# Altium PCB Copy of Kart2.PcbDoc (part 1 of 2)
Units mm, origin at the board's own origin, x right, y up, seen from the top; angles counter-clockwise.
Board outline 64 x 85 mm, 4 copper layers (Top Side, Ground Plane, Power Plane, Bottom Side), stack 0.844 mm thick; 85 components, 82 nets, 302 pads, 173 vias.
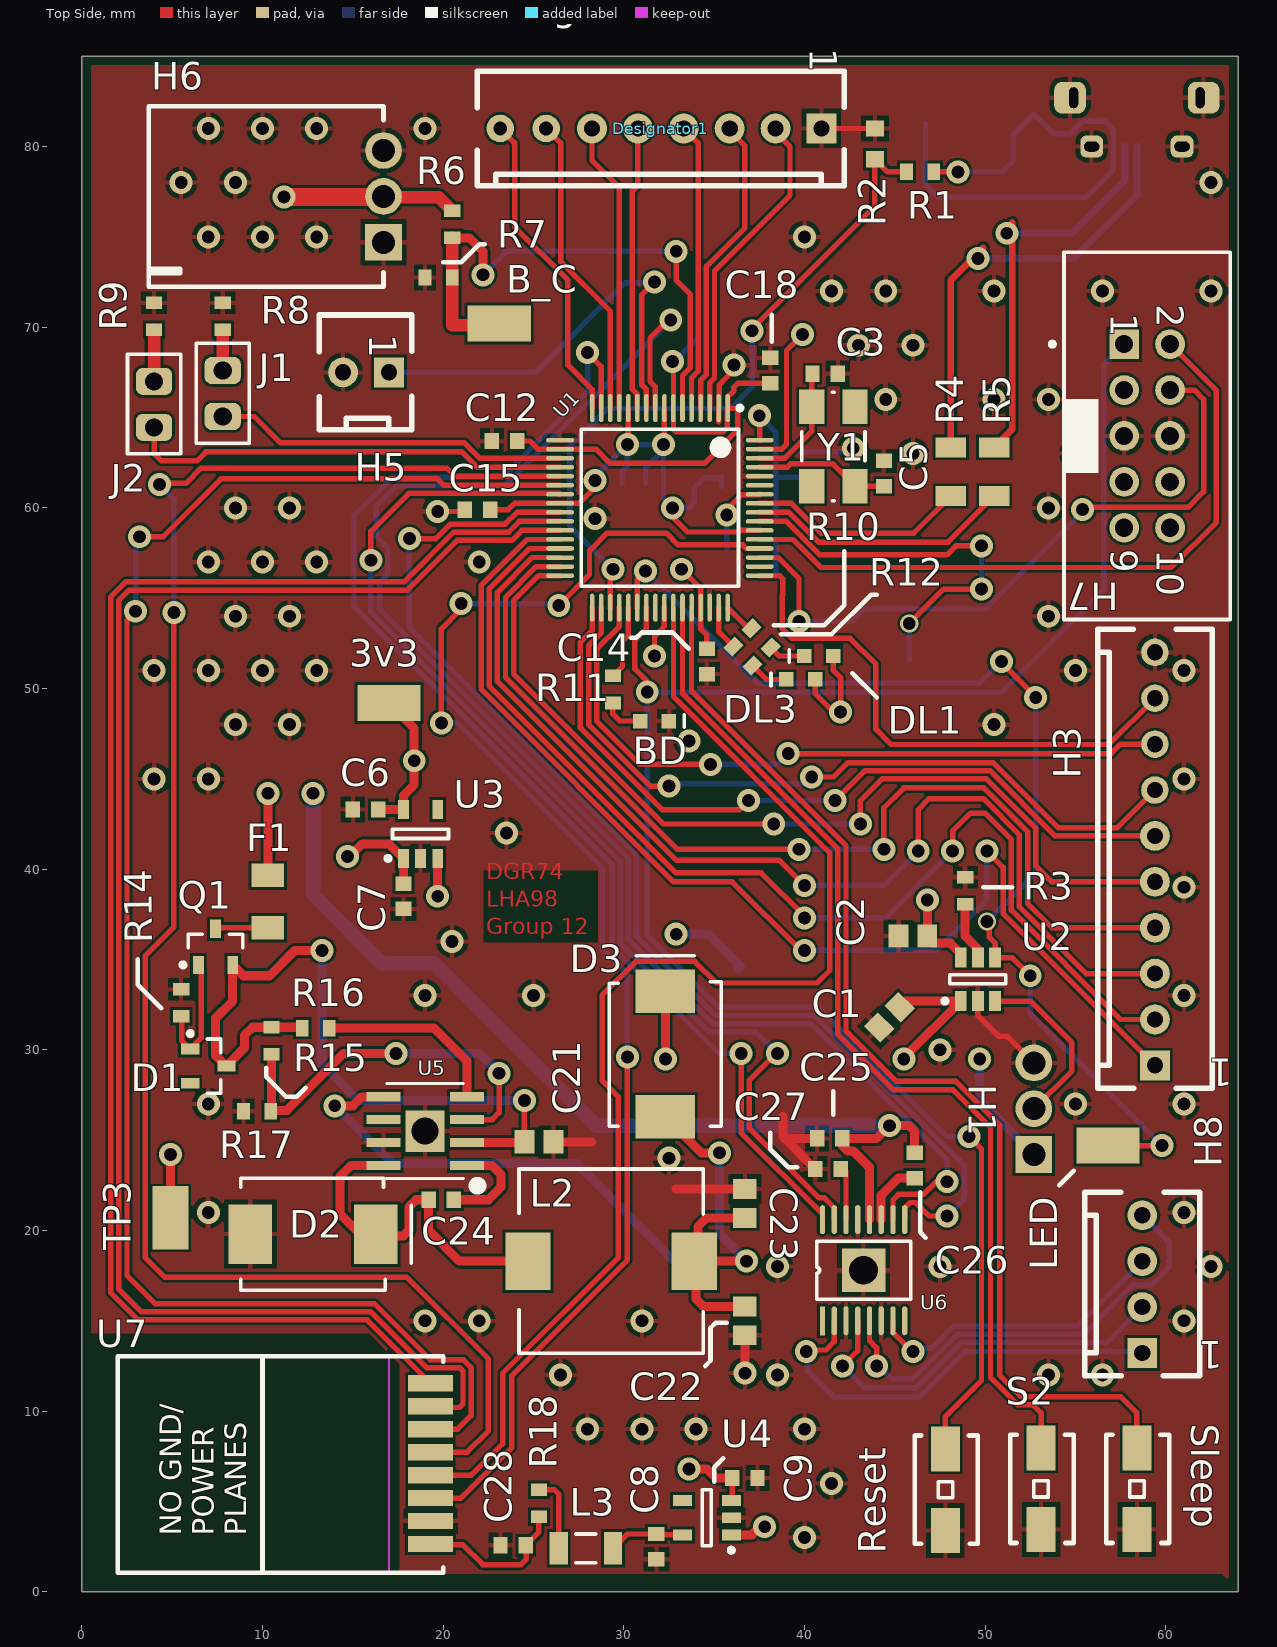
[diagram p0: Top Side view]
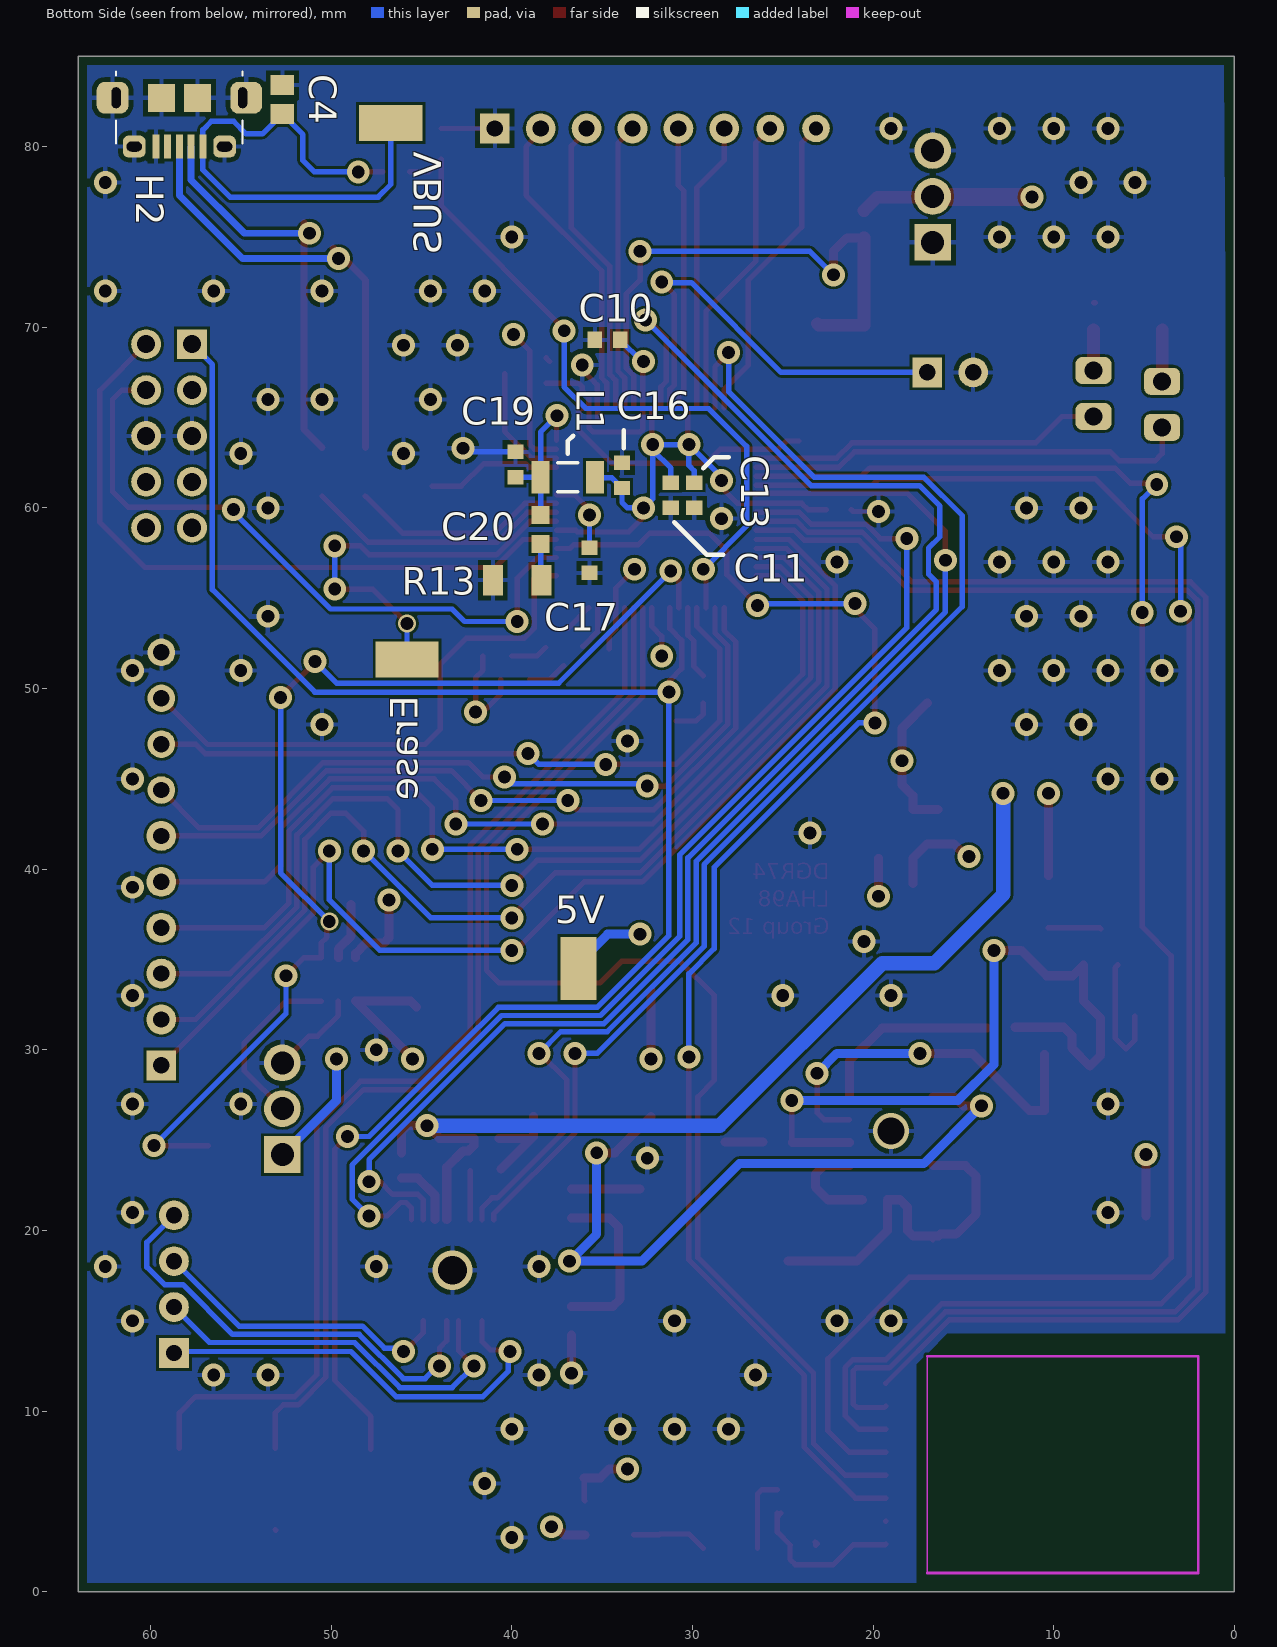
[diagram p1: Bottom Side view, seen from below]
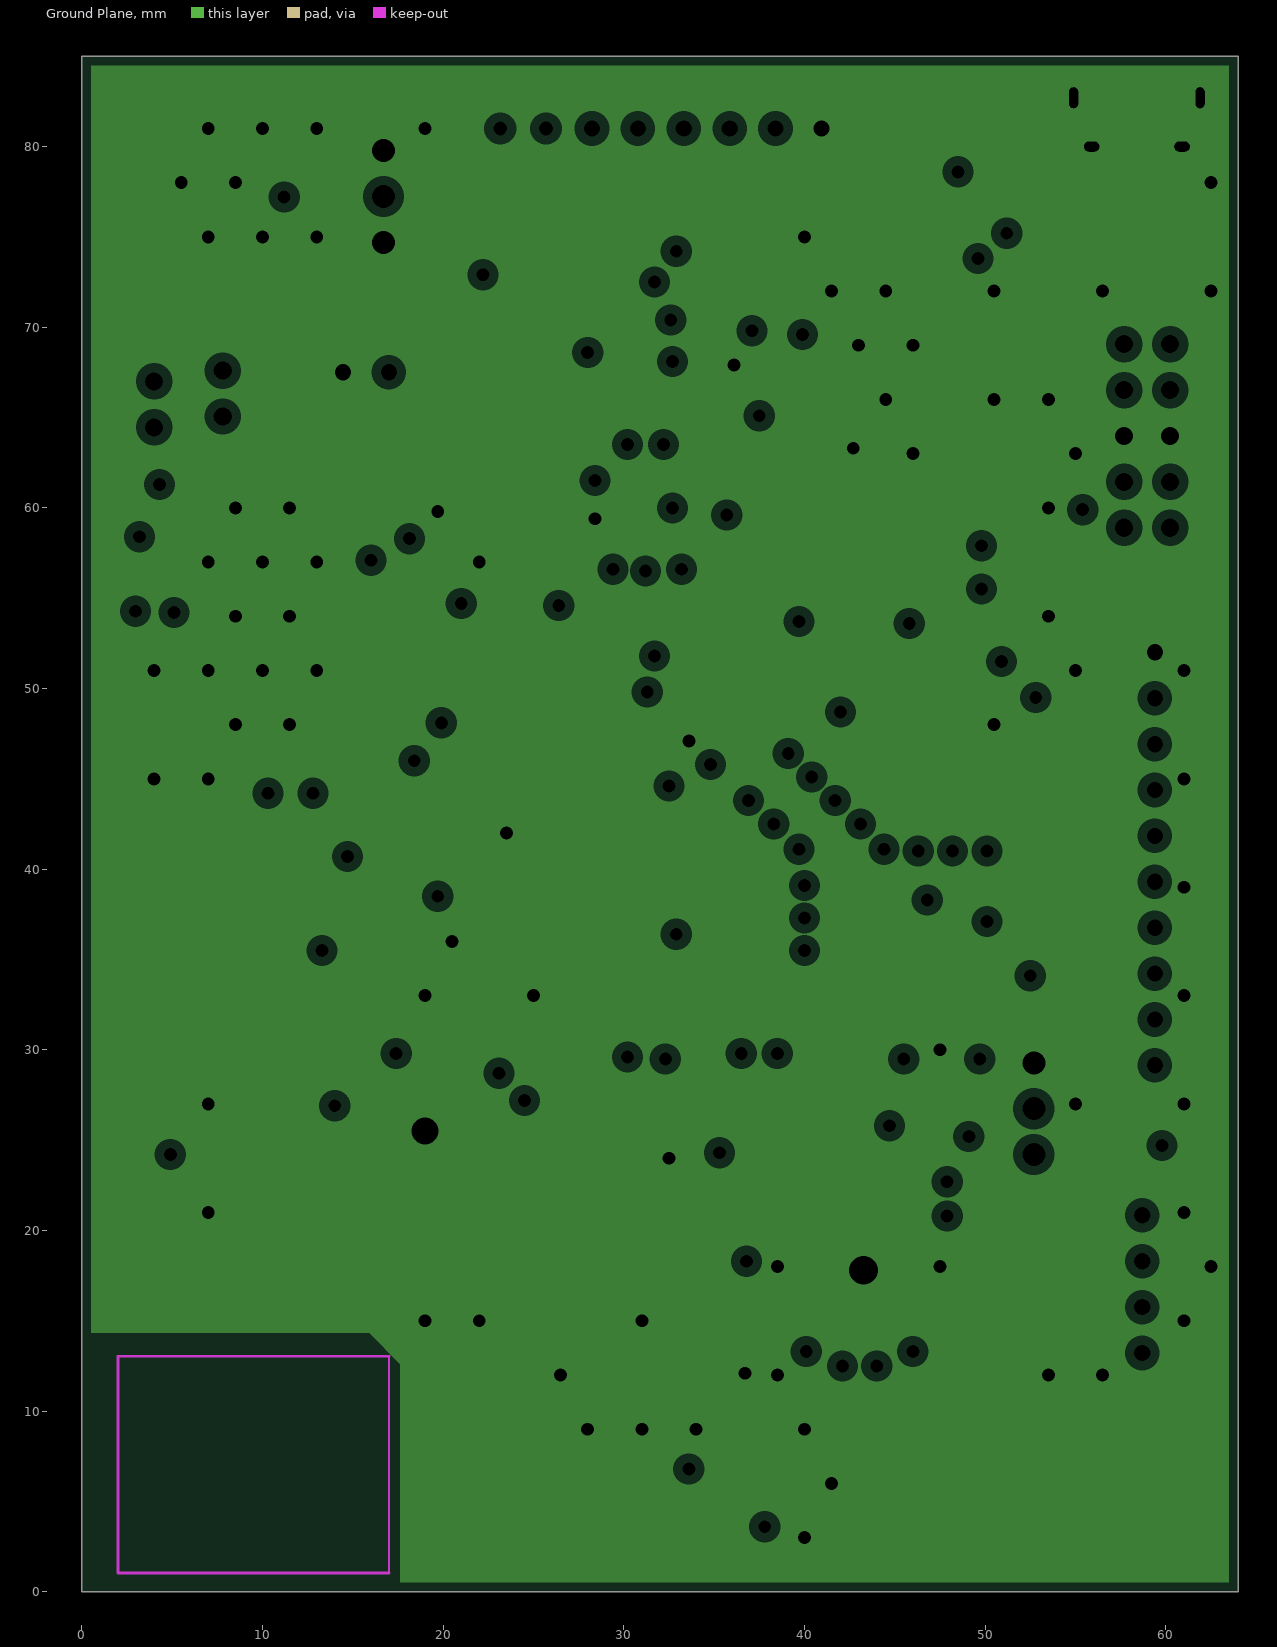
[diagram p2: Ground Plane, clearances drawn from the general rule]
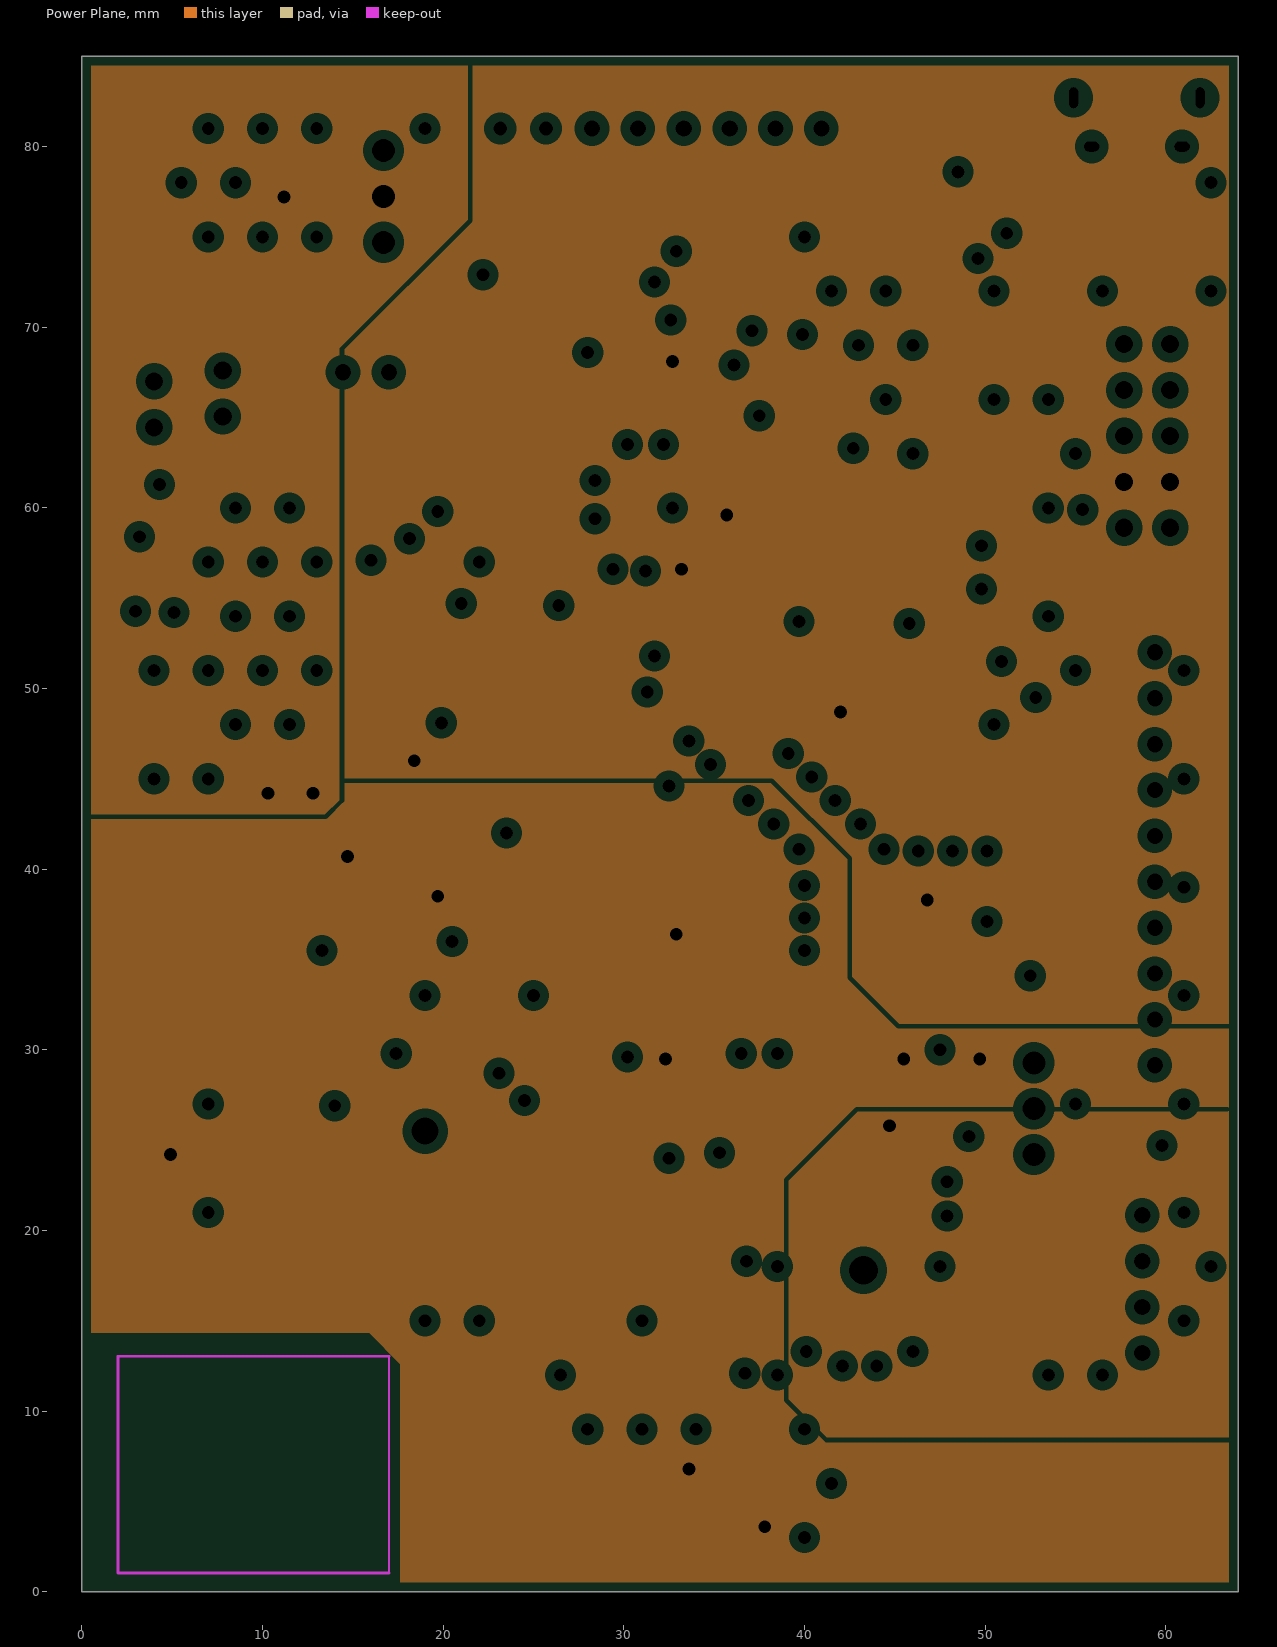
[diagram p3: Power Plane, clearances drawn from the general rule]

## Layer stack, top to bottom
Top Solder: solder mask 0.0102, Solder Resist, Dk 3.5
Top Side: signal copper 0.0356
Dielectric 1: core 0.32, FR-4, Dk 4.8
Ground Plane: plane copper 0.036, net GND
Dielectric 3: prepreg 0.127, Dk 4.2
Power Plane: plane copper 0.036, net (Multiple Nets)
Dielectric 4: core 0.254, Dk 4.2
Bottom Side: signal copper 0.0356
Bottom Solder: solder mask 0.0102, Solder Resist, Dk 3.5

## Board outline
0,85 64,85 64,0 0,0 0,85

## Design rules (kind name [scope] priority, off if disabled: settings)
BoardOutlineClearance [All] p1: gap=0.5 ignorepadtopadclearanceinfootprint=FALSE
Clearance Min_Clearance_Circuit_Labs [All] p1: gap=0.15 ignorepadtopadclearanceinfootprint=FALSE except(0: Arc-Hole Track-Hole SMDPad-Hole THPad-Hole Via-Hole Fill-Hole Poly-Hole Region-Hole Text-Hole)
DiffPairsRouting [All] p1: maxlimit=0.254 minlimit=0.254 mostfreqgap=0.254 toplayer_minwidth=0.381 toplayer_maxwidth=0.381 toplayer_prefwidth=0.381 bottomlayer_minwidth=0.381 bottomlayer_maxwidth=0.381 bottomlayer_prefwidth=0.381 maxuncoupledlength=12.7
FanoutControl Fanout_BGA [IsBGA] p1 off: bgadir=Out bgaviamode=Centered fanoutstyle=Auto fanoutdirection=Alternating viagrid=0.025 // Fanout_BGA (Default Rule)
HoleSize [All] p1: absolutevalues=TRUE maxlimit=10 minlimit=0.3 maxpercent=80.000 minpercent=20.000
MinimumAnnularRing [All] p1: minimumring=0.1
MinimumSolderMaskSliver [All] p1: minsoldermaskwidth=0.1
NetAntennae [All] p1: netantennaetolerance=1
PasteMaskExpansion [All] p1 off: expansion=0.2
PlaneClearance [All] p1: clearance=0.508
PlaneConnect [All] p1: planeconnectstyle=Relief reliefexpansion=0.508 reliefentries=4 reliefconductorwidth=0.254 reliefairgap=0.254
PolygonConnect [All] p1: connectstyle=Relief reliefconductorwidth=0.254 reliefentries=4 polygonreliefangle="90 Angle" airgapwidth=0.254
RoutingVias [All] p1: holewidth=0.5 width=1 viastyle="Through Hole" minholewidth=0.3 minwidth=0.6 maxholewidth=1 maxwidth=2
SMDNeckDown [All] p1 off: percent=50.000
SMDToCorner [All] p1: distance=98425
SMDToPlane [All] p1: distance=1968504
SilkToSolderMaskClearance SilkscreenOverComponentPads [IsPad] p1: minsilkscreentomaskgap=0.254 clearancetoexposedcopper=TRUE
SolderMaskExpansion [All] p1: expansion=0.102
ViasUnderSMD [All] p1: allowed=FALSE
Width [All] p1: maxlimit=2 minlimit=0.15 preferedwidth=0.3
21 further rules are at their usual default settings.

## Classes and differential pairs
component class RadioModule: C28 L3 R18 U7
component class MCU: 3v3 B_C BD C1 C2 C3 C4 C5 C6 C7 C8 C9 C10 C11 C12 C13 C14 C15 C16 C17 C18 C19 C20 DL1 DL3 Erase H1 H2 H3 H5 H6 H7 J1 J2 L1 LED R1 R2 R3 R4 R5 R6 R7 R8 R9 R10 R11 R12 R13 Reset S2 Sleep TP3 U1 U2 U3 U4 VBUS Y1
component class H-Bridge: C25 C26 C27 H8 U6
component class Buck_Reg: C21 C22 C23 C24 D1 D2 D3 F1 L2 Q1 R14 R15 R16 R17 U5
differential pair D: +D_P -D_N

## Components (designator, comment, footprint, x,y, rotation, side; value= is the part's Value field where it differs from the comment)
3v3 "3V3" TP_1206#1 17,49.2 r0 top value=TP (schematic designator TP5)
5V "Comment" TP_1206#1 36.3,34.5 r270 bottom
B_C "BATTERY" TP_1206#1 23.1,70.2 r0 top value=TP (schematic designator TP4)
BD "Red" WL-SMCW0603 32.5,48.2 r180 top (schematic designator DL2)
C1 "10uF" CAPC2012L 44.7,31.8 r45 top
C2 "10uF" CAPC2012L 46,36.3 r180 top
C3 "27pF" CAPC1608L 41.146,67.427 r180 top
C4 "4.7uF" CAPC2012L 52.7,82.6 r90 bottom
C5 "27pF" CAPC1608L 44.4,61.9 r270 top
C6 "1uF" CAPC1608L 15.7,43.3 r0 top
C7 "1uF" CAPC1608L 17.8,38.5 r90 top
C8 "1uF" CAPC1608L 31.8,2.5 r90 top
C9 "1uF" CAPC1608L 36.7,6.3 r180 top
C10 "100nF" CAPC1608L 34.7,69.3 r180 bottom
C11 "100nF" CAPC1608L 31.2,60.7 r270 bottom
C12 "100nF" CAPC1608L 23.4,63.7 r0 top
C13 "100nF" CAPC1608L 29.9,60.7 r270 bottom
C14 "100nF" CAPC1608L 34.6,51.5 r90 top
C15 "100nF" CAPC1608L 21.9,59.9 r180 top
C16 "100nF" CAPC1608L 33.9,61.8 r90 bottom
C17 "100nF" CAPC1608L 35.7,57.1 r90 bottom
C18 "100nF" CAPC1608L 38.1,67.6 r270 top
C19 "100nF" CAPC1608L 39.8,62.4 r270 bottom
C20 "4.7uF" CAPC1608N 38.4,58.8 r90 bottom
C21 "10uF" CAPC2012L 25.3,24.9 r180 top
C22 "33uF" CAPC2012L 36.7,15 r90 top
C23 "33uF" CAPC2012L 36.7,21.5 r270 top
C24 "100nF" CAPC1608L 19.9,21.7 r180 top
C25 "10uF" CAPC1608L 41.4,25.1 r180 top
C26 "10nF" CAPC1608L 46.1,23.6 r90 top
C27 "2.2uF" CAPC1608L 41.3,23.4 r180 top
C28 "10uF" CAPC1608L 23.876,2.576 r0 top
D1 "4V7" SOT23_L 7,29.1 r0 top
D2 "SCHOTTKY 30V 4A" SMC 12.8,19.8 r0 top
D3 "SCHOTTKY 30V 4A" SMC 32.3,29.775 r90 top
Designator1 "Comment" MOLEX_KK_8_HDR 40.94,81 r180 top
DL1 "Dark Green" WL-SMCW0603 40,51.8 r0 top
DL3 "Blue" WL-SMCW0603 39,50.5 r0 top
Erase "Erase" TP_1206#2 45.8,51.6 r180 top value=TP (schematic designator TP6)
F1 "5A" RESC3216N 10.3,38.2 r270 top
H1 "HEADER_3" HEADER_3POS 52.7,26.74 r90 top
H2 "JS_USB_MICRO_B" FCI_USB_10118194-0001LF 58.4,84.15 r0 bottom
H3 "10 Pin Molex KK Hdr" MOLEX_KK_10_HDR 59.4,29.14 r90 top
H5 "2 Pin Molex KK HDR" MOLEX_KK_2_HDR 17,67.5 r180 top
H6 "Battery_HEADER_3pin" BATT_HEADER_3POS 16.7,77.24 r90 top
H7 "Header 5X2 Vert" IDC2.54-V10D 58.97,63.98 r270 top
H8 "4 Pin Molex KK Hdr" MOLEX_KK_4_HDR 58.7,13.22 r90 top
J1 "100Mil Jumper" JMP2.54 7.8,65.056 r90 top
J2 "100Mil Jumper" JMP2.54 4,64.456 r90 top
L1 "1A max, Idc 0.3R," INDC3216L 36.9,61.7 r180 bottom
L2 "IND 5.2UH 6A" INDUCTOR5u2 29.3,18.3 r0 top
L3 "1A max, Idc 0.3R," INDC3216L 27.9,2.4 r0 top
LED "LED STRIP" TP_1206#1 56.8,24.7 r0 top value=TP (schematic designator TP1)
Q1 "SSM3J328R,LF" SOT23_L 7.4,35.7 r90 top
R1 "27K" RESC1608L 46.4,78.6 r0 top
R2 "47K" RESC1608N 43.9,80.15 r270 top
R3 "10K" RESC1608L 48.9,38.8 r270 top
R4 "27R" RESC3216L 48.1,62 r270 top
R5 "27R" RESC3216L 50.5,62 r270 top
R6 "150K" RESC1608L 20.5,75.7 r90 top
R7 "300K" RESC1608L 19.75,72.75 r0 top
R8 "10K" RESC1608L 7.8,70.6 r270 top
R9 "10K" RESC1608L 4,70.6 r270 top
R10 "2K2" RESC1608L 37.6,52.8 r135 top
R11 "2K2" RESC1608L 29.4,49.95 r270 top
R12 "2K2" RESC1608L 36.6,51.8 r135 top
R13 "1R" RESC3216L 39.7,56 r180 bottom
R14 "100K" RESC1608L 5.5,32.6 r270 top
R15 "56K" RESC1608L 10.5,30.5 r90 top
R16 "100K" RESC1608L 12.95,31.2 r180 top
R17 "10K" RESC1608L 9.7,26.6 r0 top
R18 "10R" RESC1608L 25.3,4.9 r90 top
Reset "EVQPNF05M" EVQPNF05M 47.8,5.65 r270 top (schematic designator S1)
S2 "EVQPNF05M" EVQPNF05M 53.1,5.7 r270 top
Sleep "EVQPNF05M" EVQPNF05M 58.4,5.7 r270 top (schematic designator S3)
TP3 "5V" TP_1206#1 4.9,20.7 r270 top value=TP
U1 "ATSAM4S8BA-ANR" LQFP64_L 32,60 r270 top locked
U2 "SN74LVC1T45" SOT23-6_N 49.6,33.9 r90 top
U3 "CAT6219-330TDGT3" SOT95P280X145-5N 18.75,41.95 r90 top
U4 "CAT6219-330TDGT3" SOT95P280X145-5N 34.6,4.1 r180 top
U5 "ADP2302ARDZ-5.0 BUCK" RD_8_1 19,25.5 r180 top locked value=Value
U6 "DRV8833" HTSOP16 41,15 r90 top locked
U7 "nRF24 SMD" NRF24 20,1.043 r90 top
VBUS "VBUS" TP_1206#2 46.7,81.3 r180 top value=TP (schematic designator TP2)
Y1 "12MHz" 6.0X3.5-4 41.6,63.4 r90 top

## Footprints (in the part's own frame and the unit in brackets; to place one, negate y for a bottom-side part, rotate by r counter-clockwise, add the part's x,y. Pads: shape width x height; smd on the part's side, far side on the other; paste and mask are expansions set on the pad)
6.0X3.5-4 [mm] "4 SMD 6.0X3.5 mm No Lead Crystal"
  rect 1.9x1.4 smd: 1(-2.2,-1.2) 2(2.2,-1.2) 3(2.2,1.2) 4(-2.2,1.2)
  silkscreen extent -3,-1.75 3,1.75, body extent -3,-1.75 3,1.75, height 1.2
BATT_HEADER_3POS [mil]
  rect 80x80 hole 50: 1(-100,0)
  round 80 hole 50: 2(0,0) 3(100,0)
  silkscreen extent -197,0 197,512
CAPC1608L [mm] "Chip Capacitor, Body 1.6x0.8mm, IPC High Density"
  rect 0.8x0.9 smd: 1(-0.7,0) 2(0.7,0)
  body extent -0.87,-0.48 0.87,0.48, height 0.85
CAPC1608N [mm] "Chip Capacitor, Body 1.6x0.8mm, IPC Medium Density"
  rect 1x1 smd: 1(-0.8,0) 2(0.8,0)
  body extent -0.87,-0.48 0.87,0.48, height 0.85
CAPC2012L [mm] "Chip Capacitor, Body 2.0x1.3mm, IPC High Density"
  rect 1.1x1.3 smd: 1(-0.8,0) 2(0.8,0)
  body extent -1.1,-0.72 1.1,0.72, height 1.1
EVQPNF05M [mm] "Panansonic light touch SMD push button switch"
  rect 2.5x1.6 smd: 1(-2.25,0) 2(2.25,0)
  silkscreen extent -3,-1.7 3,1.8, body extent -3,-1.7 3,1.8, height 5
FCI_USB_10118194-0001LF [mm] "Micro USB B Type Receptacle"
  rect 0.4x1.35 smd mask+0.07: 1(-1.3,4.15) 2(-0.65,4.15) 3(0,4.15) 4(0.65,4.15) 5(1.3,4.15)
  rrect50% 1.75x1.75 hole 0.5 slot 1.15 at 90 deg copper offset -0.2,0 paste+0 mask+0.1: 6(-3.5,1.45)
  rrect50% 1.25x1.2 hole 0.55 slot 0.85 at 0 deg: 6(-2.5,4.15) 6(2.5,4.15)
  rect 1.5x1.55 smd: 6(-1,1.45) 6(1,1.45)
  rrect50% 1.75x1.75 hole 0.5 slot 1.15 at 90 deg copper offset 0.2,0 paste+0 mask+0.1: 6(3.5,1.45)
  silkscreen extent -3.5,0 3.5,4
HEADER_3POS [mil]
  rect 80x80 hole 50: 1(-100,0)
  round 80 hole 50: 2(0,0) 3(100,0)
HTSOP16 [mm]
  rect 1.6x0.3 smd: 1(0,0)
  oval 1.6x0.3 smd: 2(0,-0.65) 3(0,-1.3) 4(0,-1.95) 5(0,-2.6) 6(0,-3.25) 7(0,-3.9) 8(0,-4.55) 9(5.6,-4.55) 10(5.6,-3.9) 11(5.6,-3.25) 12(5.6,-2.6) 13(5.6,-1.95) 14(5.6,-1.3) 15(5.6,-0.65) 16(5.6,0)
  rect 2.4x2.4 smd paste-0.5: 17(2.8,-2.275)
  silkscreen extent 1.2,-4.88 4.4,0.33
IDC2.54-V10D [mm] "Connector; IDC, Low Profile Male Header, Thru-Hole; 10 Position; Vertical; Pitch 2.54 mm; Body 20.32 x 9.2 x 9.45 mm (LxWxH)"
  rect 1.65x1.65 hole 1: 1(-5.08,-1.27)
  round 1.65 hole 1: 2(-5.08,1.27) 3(-2.54,-1.27) 4(-2.54,1.27) 5(0,-1.27) 6(0,1.27) 7(2.54,-1.27) 8(2.54,1.27) 9(5.08,-1.27) 10(5.08,1.27)
  silkscreen extent -10.16,-5.37 10.16,4.6, body extent -10.16,-4.6 10.16,4.6, height 9.45
INDC3216L [mm] "Chip Inductor, Body 3.2x1.6mm, IPC High Density"
  rect 1x1.8 smd: 1(-1.5,0) 2(1.5,0)
  silkscreen extent -0.55,-0.8 0.55,0.8, body extent -1.75,-0.95 1.75,0.95, height 1.9
INDUCTOR5u2 [mm]
  rect 2.5x3.2 smd: 1(-4.6,0) 2(4.6,0)
  silkscreen extent -5.1,-5.1 5.1,5.1
JMP2.54 [mm] "Jumper Change over 2.54mm"
  rrect50% 1.5x2 hole 1: 1(0,0) 2(2.544,0)
  silkscreen extent -1.47,-1.47 4.05,1.47, body extent -1.43,-1.43 4.05,1.43, height 8.45
LQFP64_L [mm] "Thin QFP, 64-Leads, Body 10x10mm, Pitch 0.5mm, IPC High Density"
  oval 1.55x0.25 smd mask+0.07: 1(-5.525,3.75) 2(-5.525,3.25) 3(-5.525,2.75) 4(-5.525,2.25) 5(-5.525,1.75) 6(-5.525,1.25) 7(-5.525,0.75) 8(-5.525,0.25) 9(-5.525,-0.25) 10(-5.525,-0.75) 11(-5.525,-1.25) 12(-5.525,-1.75) 13(-5.525,-2.25) 14(-5.525,-2.75) 15(-5.525,-3.25) 16(-5.525,-3.75) 33(5.525,-3.75) 34(5.525,-3.25) 35(5.525,-2.75) 36(5.525,-2.25) 37(5.525,-1.75) 38(5.525,-1.25) 39(5.525,-0.75) 40(5.525,-0.25) 41(5.525,0.25) 42(5.525,0.75) 43(5.525,1.25) 44(5.525,1.75) 45(5.525,2.25) 46(5.525,2.75) 47(5.525,3.25) 48(5.525,3.75)
  oval 0.25x1.55 smd mask+0.07: 17(-3.75,-5.525) 18(-3.25,-5.525) 19(-2.75,-5.525) 20(-2.25,-5.525) 21(-1.75,-5.525) 22(-1.25,-5.525) 23(-0.75,-5.525) 24(-0.25,-5.525) 25(0.25,-5.525) 26(0.75,-5.525) 27(1.25,-5.525) 28(1.75,-5.525) 29(2.25,-5.525) 30(2.75,-5.525) 31(3.25,-5.525) 32(3.75,-5.525) 49(3.75,5.525) 50(3.25,5.525) 51(2.75,5.525) 52(2.25,5.525) 53(1.75,5.525) 54(1.25,5.525) 55(0.75,5.525) 56(0.25,5.525) 57(-0.25,5.525) 58(-0.75,5.525) 59(-1.25,5.525) 60(-1.75,5.525) 61(-2.25,5.525) 62(-2.75,5.525) 63(-3.25,5.525) 64(-3.75,5.525)
  silkscreen extent -5.65,-4.35 4.35,4.55, body extent -5,-5 5,5, height 1.6
MOLEX_KK_2_HDR [mil] "MOLEX_KK_2_HDR"
  rect 65x65 hole 35.43: 1(0,0)
  round 65 hole 35.43: 2(100,0)
  silkscreen extent -50,-125 152,125, body extent -44,-121 146,119, height 630
MOLEX_KK_4_HDR [mil] "MOLEX_KK_4_HDR"
  rect 65x65 hole 35.43: 1(0,0)
  round 65 hole 35.43: 2(100,0) 3(200,0) 4(300,0)
  silkscreen extent -50,-125 350,125, body extent -44,-119 343,119, height 630
MOLEX_KK_8_HDR [mil] "MOLEX_KK_8_HDR"
  rect 65x65 hole 35.43: 1(0,0)
  round 65 hole 35.43: 2(100,0) 3(200,0) 4(300,0) 5(400,0) 6(500,0)
  round 60 hole 30: 7(600,0) 8(700,0)
  silkscreen extent -50,-125 750,125, body extent -43,-119 743,119, height 630
MOLEX_KK_10_HDR [mil] "MOLEX_KK_10_HDR"
  rect 65x65 hole 35.43: 1(0,0)
  round 65 hole 35.43: 2(100,0) 3(200,0) 4(300,0) 5(400,0) 6(500,0)
  round 60 hole 35.43: 7(600,0) 8(700,0) 9(800,0) 10(900,0)
  silkscreen extent -50,-125 951,125, body extent -44,-120 944,120, height 630
NRF24 [mm]
  rect 0.9x2.5 smd: 1(1.6,0.7) 2(2.871,0.7) 3(4.143,0.7) 4(5.414,0.7) 5(6.686,0.7) 6(7.957,0.7) 7(9.229,0.7) 8(10.5,0.7)
  Keep-Out Layer lines w0.1: 0,3 12,3
  Keep-Out Layer lines w0.15: 0,3 0,18 12,18 12,3
  silkscreen extent 0,0 12,18
RD_8_1 [mil]
  rect 74x20 smd paste+0 mask+0: 1(-91,75) 2(-91,25) 3(-91,-25) 4(-91,-75) 5(91,-75) 6(91,-25) 7(91,25) 8(91,75)
  rect 84.65x90 smd paste-44.5 mask+0: EPAD(0,0)
  silkscreen extent -118,-104 84,123, body extent 0,0 10,10, height 10
RESC1608L [mm] "Chip Resistor, Body 1.6x0.8mm, IPC High Density"
  rect 0.7x0.9 smd: 1(-0.75,0) 2(0.75,0)
  body extent -0.85,-0.48 0.85,0.48, height 0.9
RESC1608N [mm] "Chip Resistor, Body 1.6x0.8mm, IPC Medium Density"
  rect 0.9x1 smd: 1(-0.85,0) 2(0.85,0)
  body extent -0.85,-0.48 0.85,0.48, height 0.6
RESC3216L [mm] "Chip Resistor, Body 3.1x1.6mm, IPC High Density"
  rect 1.1x1.7 smd: 1(-1.35,0) 2(1.35,0)
  body extent -1.68,-0.87 1.68,0.87, height 2.54
RESC3216N [mm] "Chip Resistor, Body 3.2x1.6mm, IPC Medium Density"
  rect 1.3x1.8 smd: 1(-1.45,0) 2(1.45,0)
  body extent -1.68,-0.87 1.68,0.87, height 0.71
SMC [mm] "DO-214-AB/SMC; 2 C-Bend Leads; Body 7.9 x 5.9 mm, inc. leads (LxW)"
  rect 2.4x3.3 smd: 1(-3.475,0) 2(3.475,0)
  silkscreen extent -4,-3.1 5.43,3.1
SOT23-6_N [mm]
  rect 1.1x0.65 smd: 1(-1.2,0.95) 2(-1.2,0) 3(-1.2,-0.95) 4(1.2,-0.95) 5(1.2,0) 6(1.2,0.95)
  silkscreen extent -1.32,-1.55 0.25,1.95, body extent -0.9,-1.55 0.9,1.55, height 1.45
SOT23_L [mm] "SOT23, 3-Leads, Body 2.9x1.3mm, Pitch 0.95mm, Lead Span 2.3mm, IPC High Density"
  rect 1x0.6 smd: 1(-1,0.95) 2(-1,-0.95) 3(1,0)
  silkscreen extent -1.12,-1.5 0.7,1.92, body extent -0.7,-1.5 0.7,1.5, height 1.1
SOT95P280X145-5N [mm] "SOT23, 5-Leads, Body 2.90x2.80mm, Pitch 0.95mm, IPC Medium Density"
  rect 1.05x0.6 smd: 1(-1.35,0.95) 2(-1.35,0) 3(-1.35,-0.95) 4(1.35,-0.95) 5(1.35,0.95)
  silkscreen extent -1.47,-1.55 0.25,1.92, body extent -0.87,-1.52 0.87,1.53, height 1.45
TP_1206#1 [mm] "Test Point Pad"
  rect 3.5x2 smd: 1(0,0)
  body extent -1.62,-0.85 1.63,0.8, height 2
TP_1206#2 [mm] "Test Point Pad"
  rect 3.5x2 smd far side: 1(0,0)
  body extent -1.62,-0.85 1.63,0.8, height 2
WL-SMCW0603 [mm] "2.4 x 0.8 x 0.7mm LED"
  rect 0.8x0.8 smd: 1(0,0) 2(1.6,0)
  silkscreen extent -0.85,-0.35 -0.85,0.35

## Part data
3v3 B_C Erase LED TP3 VBUS: library part TP_1206, "Test-Point 3.3x1.6x2.1mm SMD", Manufacturer="Harwin Inc", Manufacturer Part Number=S1751-46R, Supplier Part Number 1=952-1478-2-ND, Mounting Type="Surface Mount", Storage Location=ProtoPlace, Supplier="ECE Dept", Supplier 1=Digi-Key, Supplier 2=Farnell, Supplier Part Number 2=1826282, Type="PC Test Point"
BD: library part DL_150060RS75000, "LED Red 250mcd 0603 SMD", Forward Current If=30, Forward Voltage=2, Manufacturer="WURTH ELEKTRONIK", Manufacturer Part Number=150060RS75000, Supplier Part Number 1=2322071, LED Colour=Red, LED Mounting=SMD, Lens Shape=Rectangular, Luminous Intensity=250, Storage Location="PCB Assembly WS", Supplier="ECE Dept", Supplier 1=Farnell, Viewing Angle=140°, Wavelength Typ=625
C1 C2 C21: library part CC_10uF_16V_0805, "CAP CER 10uF X5R 16V 0805", Manufacturer="Samsung Electro-Mechanics", Manufacturer Part Number=CL21A106KOQNNWE, Max Voltage=16V, Operating Temperature="-55°C ~ 85°C", Package / Case="0805 (2012 Metric)", Ratings=-, Supplier Part Number 1=1276-2894-1-ND, Temperature Coefficient=X5R, Tolerance=±10%, Applications="General Purpose", Category=Capacitors, Code_IPC=2012[0805], ComponentLink1Description=http://www.samsungsem.com/kr/support/product-search/mlcc/CL21A106KOQNNWE.jsp, ComponentLink1URL=http://www.samsungsem.com/kr/support/product-search/mlcc/CL21A106KOQNNWE.jsp, Features=-, Height - Seated (Max)=-, Lead Spacing=-, Lead Style=-, Mounting Type="Surface Mount, MLCC", Note="Footprint corresponds to dimensions for bulk cassette packaging. This case size has tightened tolerances.", Notification="Current market demand for these product types have resulted in fluctuating and extending lead times. Lead times may differ.", PackageReference=0805, Packaging="Cut Tape (CT)", Part Status=Active, Pricing 1="1=0.35, 10=0.25, 100=0.1178, 500=0.08254, 1000=0.06831 (NZD)", RoHS="RoHS Compliant", Size / Dimension="0.079\" L x 0.049\" W (2.00mm x 1.25mm)", Stock 1=20000, Supplier 1=Digi-Key, Thickness (Max)="0.055\" (1.40mm)", Voltage - Rated=16V
C3 C5: library part CC_27pF_0603, "CAP CER 27pF NPO/COG +-5% 50V 0603", Code_IPC="1608 [0603]", PackageReference=0603, Storage Location="PCB Assembly WS", Supplier="ECE Dept"
C4: library part CC_4.7uF_0805, "CAP CER 4.7uF Y5V -20% +80% 25V 0805", Max Voltage=25V, Code_IPC=2012[0805], Note="Footprint corresponds to dimensions for bulk cassette packaging. This case size has tightened tolerances.", PackageReference=0805, Storage Location="PCB Assembly WS", Supplier="ECE Dept"
C6 C7 C8 C9: library part CC_1uF_0603, "CAP CER 1uF Y5V -20% +80% 16V 0603", Max Voltage=16V, Code_IPC="1608 [0603]", PackageReference=0603, Storage Location="PCB Assembly WS", Supplier="ECE Dept"
C10 C11 C12 C13 C14 C15 C16 C17 C18 C19 C24: library part CC_100nF_0603, "CAP CER 100nF X7R +-10% 50V 0603", Code_IPC="1608 [0603]", PackageReference=0603, Storage Location="PCB Assembly WS", Supplier="ECE Dept"
C20: library part CC_4.7uF_0603, "CAP CER 4.7uF X5R +-20%  10V 0603", Max Voltage=10V, Code_IPC=2012[0805], Note="Footprint corresponds to dimensions for bulk cassette packaging. This case size has tightened tolerances.", PackageReference=0805, Storage Location="PCB Assembly WS", Supplier="ECE Dept"
C22 C23: library part CC_33uF_6V3_0805, "CAP CER 33uF X5R 6V3 0805", Manufacturer="TDK Corporation", Manufacturer Part Number=C2012X5R0J336M125AC, Operating Temperature="-55°C ~ 85°C", Package / Case="0805 (2012 Metric)", Ratings=-, Supplier Part Number 1=445-5986-1-ND, Temperature Coefficient=X5R, Tolerance=±20%, Voltage - Rated=6.3V, Applications="General Purpose", Category=Capacitors, ComponentLink1Description=https://product.tdk.com/info/en/catalog/datasheets/mlcc_commercial_general_en.pdf, ComponentLink1URL=https://product.tdk.com/info/en/catalog/datasheets/mlcc_commercial_general_en.pdf, Failure Rate=-, Features="Low ESL", Height - Seated (Max)=-, Lead Spacing=-, Lead Style=-, Mounting Type="Surface Mount, MLCC", Notification="Current market demand for these product types have resulted in fluctuating and extending lead times. Lead times may differ.", Packaging="Cut Tape (CT)", Part Status=Active, Pricing 1="1=1.65, 10=1.262, 100=0.9023, 500=0.6985, 1000=0.60149 (NZD)", RoHS="RoHS Compliant", Size / Dimension="0.079\" L x 0.049\" W (2.00mm x 1.25mm)", Stock 1=20000, Supplier 1=Digi-Key, Thickness (Max)="0.057\" (1.45mm)"
C25 C28: library part CC_10uF_0603, "CAP CER 10UF X5R +-20% 6V3 0603", Voltage - Rated=6.3V, Storage Location="PCB Assembly WS", Supplier="ECE Dept"
C26: library part CC_10nF_0603, "CAP CER 10nF X7R +-10% 50V 0603", Code_IPC="1608 [0603]", PackageReference=0603, Storage Location="PCB Assembly WS", Supplier="ECE Dept"
C27: library part CC_2.2uF_0603, "CAP CER 2.2uF X5R +-20% 10V 0603", Max Voltage=10V, Code_IPC="1608 [0603]", PackageReference=0603, Storage Location="PCB Assembly WS", Supplier="ECE Dept"
D1: library part DZ_4.7V, "BZX84C4V7LT1G - DIODE, ZENER, 4.7V, 225MW, SOT23", Breakdown Voltage Max=5, Breakover Voltage Min=4.7, Diode Case Style=SOT-23, Manufacturer="ON SEMICONDUCTOR", Manufacturer Part Number=BZX84C4V7LT1G, Power Dissipation Pd=225, Supplier Part Number 1=1459051, Supplier 1=Farnell, Supplier 2=Digi-Key, Supplier Part Number 2=BZX84C4V7LT1GOSCT-ND
D2 D3: library part MBRS330T3G, "DIODE SCHOTTKY 30V 4A SMC", Base Part Number=MBRS330, Capacitance @ Vr, F=-, Current - Average Rectified (Io)=4A, Manufacturer="ON Semiconductor", Operating Temperature - Junction="-65°C ~ 150°C", Package / Case="DO-214AB, SMC", Supplier Device Package=SMC, Supplier Part Number 1=MBRS330T3GOSCT-ND, Category="Discrete Semiconductor Products", ComponentLink1Description=http://www.onsemi.com/pub/Collateral/MBRS340T3-D.PDF, ComponentLink1URL=http://www.onsemi.com/pub/Collateral/MBRS340T3-D.PDF, Diode Type=Schottky, Manufacturer Part Number=MBRS330T3G, Mounting Type="Surface Mount", Packaging="Cut Tape (CT)", Part Status=Active, Pricing 1="1=0.93, 10=0.79, 100=0.5902, 500=0.46368, 1000=0.35829 (NZD)", RoHS="RoHS Compliant", Speed="Fast Recovery =< 500ns, > 200mA (Io)", Stock 1=8919, Supplier 1=Digi-Key
DL1: library part DL_150060GS75000, "LED Dk Green 430mcd 0603 SMD", Forward Current If=30, Forward Voltage=3.2, Manufacturer="WURTH ELEKTRONIK", Manufacturer Part Number=150060GS75000, Supplier Part Number 1=2322070, LED Colour="Dark Green", LED Mounting=SMD, Lens Shape=Rectangular, Luminous Intensity=430, Storage Location="PCB Assembly WS", Supplier="ECE Dept", Supplier 1=Farnell, Viewing Angle=140°, Wavelength Typ=520
DL3: library part DL_150060BS75000, "LED Blue 270mcd 0603 SMD", Forward Current If=30, Forward Voltage=3.2, Manufacturer="WURTH ELEKTRONIK", Manufacturer Part Number=150060BS75000, Supplier Part Number 1=2322069, LED Colour=Blue, Luminous Intensity=270, Pricing="1=0.3844, 50=0.3252, 100=0.2957, 500=0.2365 (NZD)", Storage Location="PCB Assembly WS", Supplier="ECE Dept", Supplier 1=Farnell, Viewing Angle=120°, Wavelength Typ=470
F1: library part FS_Fuse_5.0A, "Fuse 5.0A Fast Acting 1206 SMD", Case/Package=1206, Case Code (Metric)=3216, DC Cold Resistance=19mR, Manufacturer="Bel TRP", Manufacturer Part Number=C1F5, Max Operating Temperature=125°C, Min Operating Temperature=-55°C, Supplier Part Number 1=507-1886-1-ND, Voltage Rating=125V, Voltage Rating (DC)=63V, Approvals=CE,cURus, Case Code (Imperial)=1206, ComponentLink1Description=http://www.farnell.com/datasheets/2571625.pdf, ComponentLink1URL=http://www.farnell.com/datasheets/2571625.pdf, ComponentLink2Description=http://belfuse.com/pdfs/C1F.pdf, ComponentLink2URL=http://belfuse.com/pdfs/C1F.pdf, ComponentLink3Description=http://www.mouser.com/ds/2/643/C1F-594910.pdf, ComponentLink3URL=http://www.mouser.com/ds/2/643/C1F-594910.pdf, ComponentLink4Description=https://belfuse.com/resources/StewartConnector/C1F.pdf, ComponentLink4URL=https://belfuse.com/resources/StewartConnector/C1F.pdf, Contact Plating=Nickel,Tin, Current Rating=5A, Fuse Type="Board Mount (Cartridge Style Excluded)", Length=0.126inch, Mount="Surface Mount", Number of Pins=2, Packaging="Tape and Reel", Pricing 1="1=0.32, 5=0.312, 10=0.298, 50=0.2662, 100=0.2479, 250=0.22032, 500=0.1836, 1000=0.17442 (USD)", Stock 1=725, Supplier 1=Digi-Key, Supplier 2=Element14, Supplier Part Number 2=2848595, Voltage Rating (AC)=125V, Width=0.062inch
H1 H6: "3Pin Header 2.54mm spacing"
H2: library part JS_USB_MICRO_B_SMT, "CONN USB MICRO B RECPT SMT R/A", Manufacturer=FCI, Manufacturer Part Number=10118194-0001LF, Supplier Part Number 1=609-4618-1-ND, Features="Shielded, Solder Retention", Gender=Receptacle, Mounting Type="Surface Mount, Right Angle, Horizontal", Number of Contacts=5, Specifications="USB 2.0", Supplier 1=Digi-Key
H3: library part JA_MOLEX_KK_10POS, "CONN HEADER 10POS 2.54mm VERT_ Thru Hole", Supplier Part Number 1=1756828, Storage Location="ECE Dept Store", Supplier="ECE Dept", Supplier 1=Farnell
H5: library part JA_MOLEX_KK_2POS, "CONN HEADER 2POS 2.54mm VERT_Thru Hole", Supplier Part Number 1=1462926, Storage Location="ECE Dept Store", Supplier="ECE Dept", Supplier 1=Farnell
H7: library part JA_HDR_IDC_5X2_VERT, "IDC Header, 2,54mm, 10-Pin, Vert", Supplier Part Number 1=1096985, Storage Location="ECE Dept Store", Supplier="ECE Dept", Supplier 1=Farnell
H8: library part JA_MOLEX_KK_4POS, "CONN HEADER 4POS 2.54mm VERT_Thru Hole", Manufacturer=Molex, Manufacturer PN=22-23-2041, Supplier Part Number 1=9731164, Storage Location="ECE Dept Store", Supplier="ECE Dept", Supplier 1=Farnell
J1 J2: library part TP_JUMPER, "2.54mm Jumper Thru Hole", Supplier Part Number 1=1097975, No. of Positions=2, No. of Rows=1, Pitch Spacing=2.54, Storage Location="ECE$ Store", Supplier="ECE Dept", Supplier 1=Farnell
L1 L3: library part IN_Ferrite-Bead, "Ferrite Bead, Rdc 0.3R, Z100MHZ 600R, Imax 1A, SMD 1206", DC Current Rating=1, DC Resistance Max=0.08, Ferrite Case Style="1206 ^3216 Metric]", Frequency Range="50MHz to 1", Impedance Tolerance="± 25%", Manufacturer=FAIR-RITE, Manufacturer Part Number=2512066017Y1, Supplier Part Number 1=1612060, Ferrite Mounting=SMD, Impedance=600, Manufacturer PN=2512066017Y1, Storage Location="PCB Assembly WS", Supplier="ECE Dept", Supplier 1=Farnell
L2: library part CDRH104RNP-5R2NC, "FIXED IND 5.2UH 6A 22 MOHM SMD", Current - Saturation=5.6A, DC Resistance (DCR)="22 mOhm Max", Frequency - Self Resonant=-, Manufacturer="Sumida America Components Inc.", Operating Temperature="-40°C ~ 100°C", Package / Case=Nonstandard, Supplier Part Number 1=308-2280-1-ND, Tolerance=±30%, Category="Inductors, Coils, Chokes", ComponentLink1Description=http://products.sumida.com/products/pdf/CDRH104R.pdf, ComponentLink1URL=http://products.sumida.com/products/pdf/CDRH104R.pdf, Height - Seated (Max)="0.157\" (4.00mm)", Manufacturer Part Number=CDRH104RNP-5R2NC, Material - Core=Ferrite, Mounting Type="Surface Mount", Packaging="Cut Tape (CT)", Part Status=Active, Pricing 1="1=2.9, 10=2.678, 100=1.8743, 500=1.5173 (NZD)", Q @ Freq=-, Ratings=-, RoHS="RoHS Compliant", Shielding=Shielded, Size / Dimension="0.402\" L x 0.394\" W (10.20mm x 10.00mm)", Stock 1=3849, Supplier 1=Digi-Key, Supplier Device Package=-, Type=-
Q1: library part TM_SSM3J328R, "MOSFET P-CH 20V 6A SOT23-3", Case/Package=SOT-23-3, Continuous Drain Current (ID)=6A, Drain to Source Breakdown Voltage=-20V, Drain to Source Resistance=47.4mR, Drain to Source Voltage (Vdss)=20V, Gate to Source Voltage (Vgs)=8V, Input Capacitance=840pF, Input Capacitance (Ciss) @ Vds="840pF @ 10V", Manufacturer=Toshiba, Max Operating Temperature=150°C, Max Power Dissipation=1W, Min Operating Temperature=-55°C, Package / Case="SOT-23-3 Flat Leads", Package Quantity=3000, Power Dissipation=2W, Supplier Device Package=SOT-23F, Supplier Part Number=SSM3J328RLFDKR-ND, ComponentLink1Description=https://datasheet.ciiva.com/11158/ssm3j328r-datasheet-en-20140301-11158652.pdf, ComponentLink1URL=https://datasheet.ciiva.com/11158/ssm3j328r-datasheet-en-20140301-11158652.pdf, Current - Continuous Drain (Id) @ 25° C=6A, Element Configuration=Single, FET Feature="Logic Level Gate, 1.5V Drive", FET Type="MOSFET P-Channel, Metal Oxide", Gate Charge (Qg) @ Vgs="12.8nC @ 4.5V", Manufacturer Part Number=SSM3J328R,LF, Mount="Surface Mount", Number of Channels=1, Number of Elements=1, Number of Pins=3, Packaging="Tape and Reel", Power - Max=1W, Pricing="1=0.79, 10=0.658, 25=0.5772, 100=0.4939, 250=0.42836, 500=0.36284, 1000=0.27972 (NZD)", Radiation Hardening=No, Rds On Max=29.8mR, Storage Location="PCB Assembly WS", Supplier=Digi-Key, Supplier 1=Digi-Key, Supplier Part Number 1=SSM3J328RLFDKR-ND, Turn-Off Delay Time=107ns, Turn-On Delay Time=32ns, Vgs(th) (Max) @ Id="1V @ 1mA"
R1: library part RS_27K, "RES 27K OHM 1/10W 5% 0603 SMD", Storage Location="PCB Assembly WS", Supplier="ECE Dept"
R2: library part RS_47K, "RES 47.0K OHM 1/10W 5% 0603 SMD", Storage Location="PCB Assembly WS", Supplier="ECE Dept"
R3 R8 R9 R17: library part RS_10K, "RES 10.0K OHM 1/10W 5% 0603 SMD", Storage Location="PCB Assembly WS", Supplier="ECE Dept"
R4 R5: library part RT_27R, "RES 27R OHM 1/4W 5% 1206 SMD", Storage Location="PCB Assembly WS", Supplier="ECE Dept"
R6: library part RS_150K, "RES 150K OHM 1/10W 5% 0603 SMD", Storage Location="PCB Assembly WS", Supplier="ECE Dept"
R7: library part RS_300K, "RES 300K OHM 1/10W 5% 0603 SMD", Storage Location="PCB Assembly WS", Supplier="ECE Dept"
R10 R11 R12: library part RS_2K2, "RES 2.2K OHM 1/10W 5% 0603 SMD", Storage Location="PCB Assembly WS", Supplier="ECE Dept"
R13: library part RT_1R, "RES 1R OHM 1/4W 5% 1206 SMD", Storage Location="PCB Assembly WS", Supplier="ECE Dept"
R14 R16: library part RS_100K, "RES 100K OHM 1/10W 5% 0603 SMD", Storage Location="PCB Assembly WS", Supplier="ECE Dept"
R15: library part RS_56K, "RES 56.0K OHM 1/10W 5% 0603 SMD", Storage Location="PCB Assembly WS", Supplier="ECE Dept"
R18: library part RS_10R, "RES 10 OHM 1/10W 5% 0603 SMD", Storage Location="PCB Assembly WS", Supplier="ECE Dept"
Reset S2 Sleep: library part WS_EVQPNF05M, "Panasonic 6 x 3.5mm SMD Light Touch Switch Type SMD", Manufacturer=Panasonic, Supplier Part Number 1=2079481, Manufacturer PN=EVQPNF05M, PackageDescription="6.0 x 3.5 mm", Storage Location="PCB Assembly WS", Supplier="ECE Dept", Supplier 1=Farnell, Supplier 2=Digi-Key, Supplier Part Number 2=P13598SCT-ND
U1: library part SE_ATSAM4S16BA-MU, "IC MCU 32BIT 512KB FLASH 64LQFP", Manufacturer=Atmel, Package / Case=64-LQFP, Supplier Part Number 1=ATSAM4S8BA-ANRCT-ND, Voltage - Supply (Vcc/Vdd)="1.62 V ~ 3.6 V", Code_JEDEC=MO-220VMMD-3, ComponentLink1Description="Manufacturer URL", ComponentLink1URL=http://www.atmel.com/, ComponentLink2Description="SAM4S Series Datasheet", ComponentLink2URL=http://www.atmel.com/dyn/resources/prod_documents/11100.pdf, ComponentLink3Description="SAM4S Series Summary", ComponentLink3URL=http://www.atmel.com/dyn/resources/prod_documents/11100S.pdf, Connectivity="I²C, IrDA, Memory Card, SPI, SSC, UART/USART, USB", Core Processor="ARM® Cortex®-M4", Core Size=32-Bit, Data Converters="A/D 11x12b, D/A 2x12b", Manufacturer Part Number=ATSAM4S8BA-ANR, Number of I/O=47, PackageDescription="64-Pin Quad Flat No-Lead (QFN) Sawn, 9 x 9 x 1.0 mm Body, 0.5 mm Pitch, Exposed Pad", PackageReference=64PS, PackageVersion="revJ, Jul-2007", Packaging="Cut Tape (CT)", Peripherals="Brown-out Detect/Reset, DMA, POR, PWM, WDT", Program Memory Size="512KB (512K x 8)", Program Memory Type=FLASH, RAM Size="128K x 8", Speed=120MHz, Supplier 1=Digi-Key
U2: "1.8V - 5V level converter"
U3 U4: library part SV_CAT6219-330TDGT3, "IC REG LIN 3.3V 500MA TSOT23-5", Base Part Number=CAT6219, Current - Output=500mA, Package / Case="SOT-23-5 Thin, TSOT-23-5", Supplier Device Package=TSOT-23-5, Supplier Part Number=CAT6219-330TDGT3CT-ND, Voltage - Input (Max)=5.5V, Voltage - Output (Min/Fixed)=3.3V, Voltage Dropout (Max)="0.5V @ 500mA", ComponentLink1Description=http://www.onsemi.com/pub/Collateral/CAT6219-D.PDF, ComponentLink1URL=http://www.onsemi.com/pub/Collateral/CAT6219-D.PDF, Manufacturer Part Number=CAT6219-330TDGT3, Supplier=Digi-Key, Supplier 1=Digi-Key
U5: library part ADP2302ARDZ-5.0-R7, "IC REG BUCK 5V 2A 8SOIC", Current - Output=2A, Frequency - Switching=700kHz, Supplier Part Number 1=ADP2302ARDZ-5.0-R7CT-ND, Voltage - Input (Max)=20V, Voltage - Output (Min/Fixed)=5V, Manufacturer_Part_Number=ADP2302ARDZ-5.0-R7, Output Type=Fixed, Supplier 1=Digi-Key, Type=DEV, Vendor="Analog Devices Inc"
U6: "Dual H-Bridge Motor Driver 1.5A"
U7: library part NRF24, "nRF24 SMD Module", Warning="No power planes near or under device"
Y1: library part XT_CRYSTAL_12MHz_18pF, "CRYSTAL 12MHZ 18PF 6X3.5mm SMD", ESR (Equivalent Series Resistance)="60 Ohm", Frequency Stability=±50ppm, Frequency Tolerance=±30ppm, Load Capacitance=18pF, Manufacturer="CTS-Frequency Controls", Manufacturer Part Number=406C35D12M00000, Operating Mode=Fundamental, Operating Temperature="-20°C ~ 70°C", Package / Case="4-SMD, No Lead (DFN, LCC)", Supplier Part Number 1=CTX855CT-ND, Frequency=12MHz, Height="0.047\" (1.20mm)", Mounting Type="Surface Mount", Size / Dimension="0.236\" L x 0.138\" W (6.00mm x 3.50mm)", Supplier 1=Digi-Key

## Via types
v1: diameter 1.27, hole 0.711, Top Side to Bottom Side, 169 vias
v2: diameter 1, hole 0.711, Top Side to Bottom Side, 2 vias
v3: diameter 2.2, hole 1.6, Top Side to Bottom Side, 1 vias
v4: diameter 2, hole 1.5, Top Side to Bottom Side, 1 vias

## Nets (pads, with @x,y where several pads share a name; then routed paths per layer and width w, separated by ;. In a path a pad name is that pad's centre, name@x,y a point inside that pad or via, vN(x,y) a via of type N, cw(c..) or ccw(c..) an arc to the next point about the centre after c; other vN are vias at no path point)
3V3: 3v3.1 C2.1 C6.2 C10.2 C12.2 C14.2 C17.2 C18.2 DL1.2 DL3.2 H7.7 H7.8 U1.1 U1.7 U1.18 U1.45 U1.58 U2.6 U3.5 | length 56.2
  Top Side w0.3: C12.2 24.8,63.7 25.25,63.25 U1.18 28.45,63.25 29.235,62.465 34.465,62.465 36.3,64.3 36.3,65.4 36.2,65.5 35.775,65.5 U1.1 35.75,66.125 36.097,66.472 36.097,66.688 36.309,66.9 C18.2 ; v1(32.7,68.1) 32.75,68.05 U1.7 32.75,64.35 32.9,64.2 35.5,64.2 35.725,64.425 U1.1@35.725,65.525 ; v1(33.2,56.6) 34.25,55.55 U1.45 34.25,53.3 34.6,52.95 C14.2 ; v1(35.7,59.6) 35.7,59.9 36.525,60.725 37.5,60.725 U1.58 ; DL3.2 40.6,49.7 41.6,48.7 v1(42,48.7) 42,50.6 41.6,51 DL1.2
  Top Side w0.5: C6.2 U3.5 17.8,44.075 18.4,44.675 v1(18.4,46) 18.4,47.8 3v3.1 ; v1(46.8,38.3) C2.1 46.8,36.2 47.1,35.9 48.075,35.9 48.65,35.325 U2.6
  Bottom Side w0.3: v1(32.7,68.1) 32.8,68.1 C10.2 ; C17.2 v1(35.7,59.6)
3V3_Radio: C8.2 L3.2 U4.5 | length 4.2
  Top Side w0.3: L3.2 30.2,3.2 C8.2 31.85,3.15 U4.5
5V: 5V.1 C1.2 C7.2 C9.2 D3.2 H1.1 TP3.1 U2.1 U3.1 U3.3 U4.1 U4.3 | length 39.2
  Top Side w0.3: U4.3 36,5.1 C9.2 ; v1(45.5,29.5) v1@45.5,29.55
  Top Side w0.5: TP3.1@4.9,20.8 v1(4.9,24.2) ; v1@14.834,40.7 15.534,41.4 17,41.4 U3.1 C7.2 ; v1(19.7,38.5) U3.3 ; v1(32.3,29.5) D3.2 ; v1(33.6,6.8) 34.6,6.8 35.1,6.3 C9.2 ; U4.1 37.088,3.15 37.538,3.6 v1(37.8,3.6) ; C1.2 45.6,32.7 U2.1 v1@45.5,29.55
  Bottom Side w0.5: v1(32.9,36.4) 34.7,36.4 36.45,34.65 5V.1 ; v1(49.7,29.5) 49.7,27.2 H1.1
  other v1: 14.7,40.7
AOUT1: H8.1 U6.2 | length 24.4
  Top Side w0.3: v1(40.1,13.3) 40.185,13.385 41.185,13.385 41.65,13.85 U6.2 ; H8.1@58.58,13.1 H8.1
  Bottom Side w0.3: v1(40.1,13.3) 40.185,13.215 40.185,12.215 41.6,10.8 46.4,10.8 48.9,13.3 58.62,13.3 H8.1
AOUT2: H8.2 U6.4 | length 21.9
  Top Side w0.3: v1(42.1,12.5) 42.95,13.35 U6.4 ; H8.2@58.64,15.7 H8.2
  Bottom Side w0.3: v1(42.1,12.5) 43.3,11.3 46.2,11.3 48.7,13.8 56.74,13.8 H8.2
BATT_CHECK: B_C.1 R6.1 R7.2 U1.6 | length 31.2
  Top Side w0.3: v1(32.9,74.2) 32.9,72.606 33.67,71.836 33.67,67.748 33.25,67.328 U1.6
  Top Side w0.5: R6.1 21.45,74.95 22.2,74.2 v1(22.2,72.9)
  Top Side w0.7: R6.1 R7.2 20.5,70.1 23,70.1 B_C.1
  Bottom Side w0.3: v1(22.2,72.9) 23.5,74.2 v1(32.9,74.2)
BOUT1: H8.3 U6.7 | length 17
  Top Side w0.3: U6.7 44.9,14.35 45.95,13.3 v1(46,13.3)
  Bottom Side w0.3: v1(46,13.3) 46.186,13.486 47.049,13.486 48.264,14.7 55.1,14.7 H8.3
BOUT2: H8.4 U6.5 | length 25.2
  Top Side w0.3: U6.5 43.6,13.9 44,13.5 v1(44,12.5) ; H8.4@58.67,20.87 H8.4
  Bottom Side w0.3: v1(44,12.5) 44.1,12.5 44.8,11.8 46,11.8 48.45,14.25 55.45,14.25 58.2,17 59.224,17 60.2,17.976 60.2,19.34 H8.4
D_N: H2.2 R5.1 | length 22.5
  Top Side w0.381: R5.1 51.5,64.35 51.5,75.8
  Bottom Side w0.381: v1(51.2,75.2) 54.8,75.2 57.75,78.15 H2.2
D_P: H2.3 R4.1 | length 24.7
  Top Side w0.381: R4.1 48.1,72.6 49.9,74.4
  Bottom Side w0.381: v1(49.6,73.8) 54.9,73.8 58.4,77.3 H2.3
GND: BD.1 C1.1 C2.2 C3.1 C4.2 C5.1 C6.1 C7.1 C8.1 C9.1 C10.1 C11.2 C12.1 C13.2 C14.1 C15.2 C16.2 C17.1 C18.1 C19.1 C21.1 C22.1 C23.1 C25.2 C27.2 C28.1 D2.1 Designator1.1 H1.3 H2.5 H2.6 H3.10 H5.2 H6.1 H6.3 H7.5 H7.6 R2.1 R3.1 R7.1 R8.1 R9.1 R13.1 R14.1 R17.1 Reset.2 S2.2 Sleep.2 U1.2 U1.17 U1.46 U1.60 U2.2 U3.2 U4.2 U5.7 U5.EPAD U6.3 U6.6 U6.13 U6.17 U7.2 | length 30.3
  Top Side w0.3: R8.1@7.7,71.35 R8.1 ; H6.3@16.64,79.84 H6.3 ; U7.2 U7.2@19.314,3.9 ; v1(19.7,59.8) 21.1,59.8 C15.2 ; C28.1 23.1,2.651 C28.1@23.2,2.751 ; U1.2@35.25,64.75 U1.2 35.275,65.55 35.275,66.807 35.47,67.002 35.47,67.008 36.1,67.638 v1(36.1,67.9) ; C18.1@37.9,68.1 C18.1 ; 38.8,25.2 38.9,25.1 ; Designator1.1 R2.1 ; U2.2@49.62,32.68 U2.2 49.6,31.9 50.744,30.756 51.224,30.756 H1.3 ; S2.2@53.05,3.4 S2.2
  Top Side w0.5: C21.1 28.2,24.9 ; 32.9,22.3 C23.1 ; v1(36.7,12.1) C22.1 ; 38.8,25.2 38.8,26.3 ; C27.2 38.9,25.1 C25.2
  Bottom Side w0.3: C19.1 42.5,63.1 v1(42.7,63.3)
  other v1: 40,3 41.5,6 28,9 31,9 34,9 40,9 26.5,12 38.5,12 53.5,12 56.5,12 19,15 22,15 31,15 61,15 38.5,18 47.5,18 62.5,18 7,21 61,21 32.5,24 7,27 55,27 61,27 47.5,30 19,33 25,33 61,33 20.5,36 61,39 23.5,42 4,45 7,45 61,45 33.6,47.1 8.5,48 11.5,48 50.5,48 4,51 7,51 10,51 13,51 55,51 61,51 8.5,54 11.5,54 53.5,54 7,57 10,57 13,57 22,57 28.4,59.4 8.5,60 11.5,60 53.5,60 46,63 55,63 44.5,66 50.5,66 53.5,66 43,69 46,69 41.5,72 44.5,72 50.5,72 56.5,72 62.5,72 7,75 10,75 13,75 40,75 5.5,78 8.5,78 62.5,78 7,81 10,81 13,81 19,81
  other v3: 43.275,17.8
  other v4: 19,25.5
J1: J1.1 U1.19 | length 19.6
  Top Side w0.3: J1.1 9.544,65.056 11,63.6 21.173,63.6 22.023,62.75 U1.19
J2: J2.1 U1.20 | length 24.7
  Top Side w0.3: J2.1 4,63 4.4,62.6 6.368,62.6 6.868,63.1 21.036,63.1 21.886,62.25 U1.20
LED_OUT: H1.2 U2.3 | length 9.7
  Top Side w0.3: U2.3 52.5,32.7 54.8,30.4 54.8,28.84 H1.2
LED_STRIP_CTL: LED.1 U1.38 U2.4 | length 61.3
  Top Side w0.3: U1.38 30.75,56.05 v1(31.2,56.5) ; v2(50.1,37.1) 50.234,36.966 50.234,36.216 50.55,35.9 U2.4 51.5,35.1 v1(52.5,34.1) ; v1(50.9,51.5) 50.9,51.45 52.8,49.55 v1(52.8,49.5) ; LED.1 v1(59.8,24.7)
  Bottom Side w0.3: v1(31.2,56.5) 37.4,50.3 49.7,50.3 v1(50.9,51.5) ; v2(50.1,37.1) 52.8,39.8 v1(52.8,49.5) ; v1(52.5,34.1) 52.5,32 v1(59.8,24.7)
MISO: U1.27 U7.7 | length 88.8
  Top Side w0.3: U7.7 19.371,10.2 20.9,10.2 21.1,10.4 21.1,12.224 20.924,12.4 19.1,12.4 16,15.5 3.3,15.5 2.04,16.76 2.04,54.876 2.614,55.45 18.023,55.45 20.773,58.2 23.809,58.2 24.359,58.75 U1.27
MOSI: U1.22 U7.6 | length 92.3
  Top Side w0.3: v1(2.975,54.275) 2.5,53.8 2.5,17.5 4.05,15.95 16.186,15.95 19.286,12.85 21.111,12.85 21.55,12.411 21.55,9.75 20.8,9 U7.6 ; v1(3.2,58.4) 4.5,58.4 7.7,61.6 19.7,61.6 20.05,61.25 U1.22
  Bottom Side w0.3: v1(2.975,54.275) 2.975,58.175 v1(3.2,58.4)
NetC3_2: C3.2 U1.62 Y1.3 | length 6.7
  Top Side w0.3: U1.62 38.914,62.75 40.4,64.236 Y1.3 C3.2@40.4,67.427
NetC5_2: C5.2 U1.61 Y1.1 | length 7.5
  Top Side w0.3: U1.61 39.05,62.25 39.25,62.45 41.55,62.45 Y1.1 C5.2
NetC11_1: C11.1 C13.1 C15.1 C16.1 L1.2 U1.8 U1.12 U1.24 U1.54 | length 33.7
  Top Side w0.3: C15.1 23.6,59.9 23.95,60.25 U1.24 27.514,60.25 28.4,61.136 v1(28.4,61.518) ; v1(30.2,63.5) 30.25,63.55 U1.12 ; v1(32.2,63.5) 32.25,63.55 U1.8 ; v1(32.7,60) 32.7,59.5 33.535,58.665 36.365,58.665 36.45,58.75 U1.54
  Bottom Side w0.3: v1(28.4,61.518) 28.4,61.7 v1(30.2,63.5) ; C13.1 29.9,62.05 30.2,62.35 v1(30.2,63.5) ; C11.1 31.2,62.2 v1@32.2,63.2 ; L1.2@35.4,61.2 L1.2 35.377,61.677 34.477,61.677 C16.1 33.9,60.3 33.6,60 v1(32.7,60) 32.2,60.5 v1@32.2,63.2 ; v1(30.2,63.5) v1(32.2,63.5) v1@32.2,63.2
NetC19_2: C19.2 C20.2 L1.1 U1.64 | length 8.6
  Top Side w0.3: v1(37.5,65.1) 37.525,65.075 U1.64
  Bottom Side w0.3: v1(37.5,65.1) 38.4,64.2 L1.1 ; C20.2 L1.1 ; C19.2 L1.1
NetC20_1: C20.1 R13.2 | length 1.7
  Bottom Side w0.3: R13.2@38.35,56.3 38.4,56.35 C20.1
NetC21_2: C21.2 D1.3 Q1.2 R15.2 R16.2 U5.2 | length 41.4
  Top Side w0.3: R16.2@12.15,31.25 R16.2 ; U5.2 U5.2@21.346,24.9 ; C21.2@24.465,24.865 C21.2 v1(24.5,27.2)
  Top Side w0.5: R16.2@12.15,31.25 R15.2 9.45,31.25 9,30.8 9,30.1 D1.3 7.4,29.7 7.4,31.75 8.35,32.7 Q1.2 8.95,34.1 10.4,34.1 11.8,35.5 v1(13.3,35.5) ; U5.2 C21.2@24.465,24.865
  Bottom Side w0.5: v1(13.3,35.5) 13.3,29.2 15.3,27.2 v1(24.5,27.2)
NetC22_2: C22.2 C23.2 D3.1 L2.2 U5.5 | length 52.4
  Top Side w0.3: U5.5@16.682,27.399 U5.5
  Top Side w0.5: v1(14,26.9) 15,26.9 15.499,27.399 U5.5@16.682,27.399 ; D3.1 34.3,24.3 v1(35.3,24.3) ; C22.2 34.4,15.8 34,16.2 34,18.2 L2.2 ; C23.2 34.6,20.7 34.1,20.2 34.1,18.5 L2.2 ; v1(36.8,18.3) L2.2
  Bottom Side w0.5: v1(14,26.9) 17.2,23.7 27.4,23.7 32.8,18.3 v1(36.8,18.3) 35.3,19.8 v1(35.3,24.3)
NetC24_1: C24.1 U5.1 | length 5.7
  Top Side w0.3: U5.1 U5.1@21.316,23.6
  Top Side w0.5: C24.1 22.5,21.7 23.2,22.4 23.2,23.1 22.7,23.6 U5.1@21.316,23.6
NetC24_2: C24.2 D2.2 L2.1 U5.8 | length 19.6
  Top Side w0.3: D2.2 D2.2@16.375,19.7 ; D2.2@16.689,19.489 D2.2@16.7,19.5
  Top Side w0.5: D2.2 15.4,19.8 14.3,20.9 14.3,23 14.895,23.595 U5.8 ; D2.2@16.375,19.7 17.8,19.7 18.1,20 18.1,21.3 18.5,21.7 C24.2 19.2,20 20.9,18.3 L2.1
NetC26_1: C26.1 U6.11 | length 3.6
  Top Side w0.5: U6.11 44.25,21.95 45.2,22.9 C26.1
NetC27_1: C27.1 U6.14 | length 2.7
  Top Side w0.3: U6.14 C27.1@42.3,23.3
NetC28_2: C28.2 R18.1 U7.1 | length 9
  Top Side w0.3: U7.1 19.343,2.6 21.1,2.6 22.2,1.5 24.3,1.5 24.6,1.8 24.6,2.551 C28.2 25.3,3.3 R18.1 ; R18.1@25.1,4.35 R18.1 ; R18.1@25.3,4.35 R18.1
NetD1_1: D1.1 Q1.1 R14.2 | length 7
  Top Side w0.3: R14.2@5.523,31.85 5.523,30.527 D1.1 6.6,30.65 6.6,34.55 Q1.1
NetDL1_1: DL1.1 R10.1 | length 2.1
  Top Side w0.3: R10.1 38.6,51.8 DL1.1
NetDL2_2: BD.2 R11.2 | length 2.3
  Top Side w0.3: R11.2 29.4,48.6 29.8,48.2 BD.2
NetDL3_1: DL3.1 R12.1 | length 2.2
  Top Side w0.3: R12.1 37.9,50.5 DL3.1
NetF1_2: F1.2 Q1.3 | length 2.9
  Top Side w0.3: Q1.3 7.45,36.75 F1.2
NetJ1_2: J1.2 R8.2 | length 2.5
  Top Side w0.3: J1.2@7.55,67.6 J1.2
  Top Side w0.7: J1.2 R8.2
NetJ2_2: J2.2 R9.2 | length 2.9
  Top Side w0.3: R9.2 R9.2@4.05,69.8
  Top Side w0.7: J2.2 R9.2
NetL3_1: L3.1 R18.2 | length 4.2
  Top Side w0.3: R18.2 26.15,5.65 26.4,5.4 L3.1
NetR3_2: R3.2 U2.5 | length 3.2
  Top Side w0.5: R3.2 48.9,36.291 49.6,35.591 U2.5
NetR4_2: R4.2 U1.57 | length 12.1
  Top Side w0.3: U1.57 39.276,60.25 40.926,58.6 46.05,58.6 R4.2
NetR5_2: R5.2 U1.56 | length 14.7
  Top Side w0.3: U1.56 39.139,59.75 40.789,58.1 47.95,58.1 R5.2
NetR15_1: R15.1 R17.2 U5.3 | length 21.7
  Top Side w0.3: R17.2 R17.2@10.5,26.65 ; U5.3 22.717,26.135 23.1,26.518 v1(23.1,28.7)
  Top Side w0.5: R15.1 10.5,26.65 11.35,26.65 14.5,29.8 v1(17.4,29.8)
  Bottom Side w0.5: v1(17.4,29.8) 22,29.8 v1(23.1,28.7)
NetR16_1: R16.1 U5.4 | length 10.3
  Top Side w0.5: R16.1 19.5,31.2 21.311,29.389 U5.4
NetTP6_1: Erase.1 U1.55 | length 22.4
  Top Side w0.3: U1.55 39.003,59.25 40.853,57.4 47.886,57.4 48.386,57.9 v1(49.8,57.9) ; v2(45.8,53.6) 47.7,55.5 v1(49.8,55.5)
  Bottom Side w0.3: Erase.1 v2(45.8,53.6) ; v1(49.8,55.5) v1(49.8,57.9)
nRST: H7.1 Reset.1 U1.39 | length 101.2
  Top Side w0.3: U1.39 31.25,53.319 30.6,52.669 30.6,51.1 31.25,50.45 31.25,49.85 v1(31.3,49.8) ; Reset.1 47.8,9.7 49.8,11.7 49.8,24.5 v1(49.1,25.2)
  Bottom Side w0.3: v1(49.1,25.2) 47.9,25.2 42.9,30.2 42.895,30.2 40.745,32.35 35.276,32.35 31.3,36.326 v1(31.3,49.8) 50.9,49.8 56.575,55.475 56.575,67.935 H7.1
PA4: H3.8 U1.36 | length 39.2
  Top Side w0.3: U1.36 29.75,53.44 28.5,52.19 28.5,48.2 30.9,45.8 v1(34.8,45.8) ; v1(39.1,46.4) 56.976,46.4 57.496,46.92 H3.8
  Bottom Side w0.3: v1(34.8,45.8) 38.5,45.8 v1(39.1,46.4)
PA6: H3.7 U1.34 | length 42.4
  Top Side w0.3: U1.34 28.75,53.076 28.05,52.376 28.05,48.014 31.464,44.6 v1(32.5,44.6) ; v1(40.4,45.1) 41.6,45.1 42.4,45.9 50.446,45.9 54.056,42.29 57.31,42.29 H3.7
  Bottom Side w0.3: v1(32.5,44.6) 32.635,44.735 40.035,44.735 v1(40.4,45.1)
PA7: H3.5 U1.32 | length 51.5
  Top Side w0.3: U1.32 25.286,56.25 23.9,54.864 23.9,50.8 32.2,42.5 v1(38.3,42.5) ; v1(43.1,42.5) 43.1,43.8 44.3,45 50.073,45 52.8,42.273 52.8,40.2 53.7,39.3 H3.5
  Bottom Side w0.3: v1(38.3,42.5) v1(43.1,42.5)
PA8: H3.4 U1.31 | length 56.4
  Top Side w0.3: U1.31 25.15,56.75 23.45,55.05 23.45,50.614 32.964,41.1 v1(39.7,41.1) ; v1(44.4,41.1) 44.4,43.4 45.5,44.5 49.936,44.5 52.35,42.086 52.35,38.099 53.689,36.76 H3.4
  Bottom Side w0.3: v1(39.7,41.1) v1(44.4,41.1)
PA9: H3.3 U1.30 | length 60
  Top Side w0.3: U1.30 24.923,57.25 23,55.327 23,50.4 32.907,40.493 38.607,40.493 v1(40,39.1) ; v1(46.3,41) 46.3,43.3 46.9,43.9 49.9,43.9 51.9,41.9 51.9,37.913 55.593,34.22 H3.3
  Bottom Side w0.3: v1(40,39.1) 44.4,39.1 v1(46.3,41)
PA10: H3.2 U1.29 | length 62.5
  Top Side w0.3: U1.29 24.786,57.75 22.55,55.514 22.55,50.15 32.9,39.8 37.6,39.8 40,37.4 v1(40,37.3) ; v1(48.2,41) 48.2,42.1 49.2,43.1 50,43.1 51.45,41.65 51.45,37.726 57.496,31.68 H3.2
  Bottom Side w0.3: v1(40,37.3) 44.478,37.3 48.178,41 v1(48.2,41)
PA11: H3.1 U1.28 | length 64.7
  Top Side w0.3: U1.28 24.65,58.25 22.1,55.7 22.1,49.964 32.764,39.3 36,39.3 39.8,35.5 v1(40,35.5) ; v1(50.1,41) 51,40.1 51,37.54 H3.1
  Bottom Side w0.3: v1(40,35.5) 47.3,35.5 50.1,38.3 v1(50.1,41)
PA19: Designator1.6 U1.13 | length 16.1
  Top Side w0.3: Designator1.6 28.24,79.234 29.75,77.724 U1.13
PA20: Designator1.8 U1.16 | length 17.6
  Top Side w0.3: Designator1.8 23.96,80.2 23.96,75.54 26.9,72.6 26.9,67.9 28.25,66.55 U1.16
PA21: Designator1.5 U1.11 | length 15.7
  Top Side w0.3: U1.11 30.75,66.276 30.475,66.551 30.475,77.551 30.78,77.856 Designator1.5
PA22: Designator1.7 U1.14 | length 16.9
  Top Side w0.3: Designator1.7 26.5,80.2 26.5,73.636 29.25,70.886 U1.14
PA29: U1.41 | length 2.9
  Top Side w0.3: v1(31.7,51.8) 31.7,52.89 32.25,53.44 U1.41
PB0: Designator1.2 U1.3 | length 17.6
  Top Side w0.3: U1.3 34.75,66.919 35.02,67.189 35.02,73.12 39.2,77.3 39.2,79.996 38.4,80.796 Designator1.2
PB1: Designator1.3 U1.4 | length 16.8
  Top Side w0.3: U1.4 34.25,67.055 34.57,67.375 34.57,73.37 36.7,75.5 36.7,80.036 35.86,80.876 Designator1.3
PB2: Designator1.4 U1.5 | length 16
  Top Side w0.3: Designator1.4 34.12,80.2 34.12,67.561 33.75,67.191 U1.5
PB4: H3.6 U1.33 | length 43
  Top Side w0.3: U1.33 28.25,53.212 27.6,52.562 27.6,47.827 32.127,43.3 36.4,43.3 v1(36.9,43.8) ; v1(41.7,43.8) 43.35,45.45 50.259,45.45 53.869,41.84 H3.6
  Bottom Side w0.3: v1(36.9,43.8) v1(41.7,43.8)
PB5: H3.9 U1.49 | length 30.6
  Top Side w0.3: U1.49 38.624,56.25 38.8,56.074 38.8,55.2 38.765,55.165 38.765,53.321 39.313,52.773 42.527,52.773 43.95,51.35 43.95,47.75 44.8,46.9 56.84,46.9 H3.9
PB13: 
PB14: U1.63 | length 8.1
  Top Side w0.3: U1.63 38.75,63.25 39.008,63.508 39.008,68.708 v1(39.9,69.6)
PWMH0: U1.15 U6.16 | length 71.8
  Top Side w0.3: v1(28,68.6) 28,68.566 28.75,67.816 U1.15 ; v1(36.5,29.8) 36.5,25.4 41,20.9 U6.16
  Bottom Side w0.3: v1(28,68.6) 28,66.436 23.249,61.685 17.185,61.685 15.065,59.565 15.065,54.535 29.35,40.25 29.35,35.73 35.28,29.8 v1(36.5,29.8)
PWMH1: U1.23 U6.15 | length 63.1
  Top Side w0.3: v1(16,57.1) 16,58.7 18.1,60.8 26.425,60.8 U1.23 ; v1(38.5,29.8) 38.426,29.8 36.95,28.324 36.95,25.65 40.8,21.8 41.1,21.8 41.65,21.25 U6.15
  Bottom Side w0.3: v1(16,57.1) 16,54.236 29.8,40.436 29.8,35.917 34.717,31 37.3,31 v1(38.5,29.8)
PWMH2: U1.25 U6.9 | length 66.2
  Top Side w0.3: v1(18.135,58.295) 19.595,58.295 20.4,59.1 23.436,59.1 24.086,59.75 U1.25 ; U6.9 45.55,21.25 45.85,21.55 46.15,21.55 46.9,20.8 v1(47.9,20.8)
  Bottom Side w0.3: v1(18.135,58.295) 18.135,53.374 30.7,40.809 30.7,36.289 35.089,31.9 40.559,31.9 48.835,23.624 48.835,21.735 v1(47.9,20.8)
PWMH3: U1.9 U6.10 | length 84.7
  Top Side w0.3: U1.9 31.75,66.697 31.45,66.997 31.45,69.4 32.45,70.4 v1(32.6,70.4) ; U6.10 44.9,21.7 45.2,22 46.6,22 47.3,22.7 v1(47.9,22.7)
  Bottom Side w0.3: v1(32.6,70.4) 23.435,61.235 17.435,61.235 16.3,60.1 16.3,58.4 16.935,57.765 16.935,56.335 16.5,55.9 16.5,54.373 30.25,40.623 30.25,36.103 34.903,31.45 40.372,31.45 47.9,23.922 v1(47.9,22.7)
RAD_IRQ: U1.26 U7.8 | length 84.9
  Top Side w0.3: U7.8 15.793,15.05 3.114,15.05 1.59,16.574 1.59,55.063 2.427,55.9 17.836,55.9 20.586,58.65 23.623,58.65 24.223,59.25 U1.26
RADIO_EN: U1.52 U7.3 | length 79.6
  Top Side w0.3: U7.3 20.986,5.186 23.8,8 23.8,11.964 30.2,18.364 v1(30.2,29.6) ; v1(19.9,48.1) 19.9,53.3 21,54.4 v1(21,54.7) ; v1(26.4,54.6) 28.1,56.3 28.1,57.624 29.076,58.6 32.364,58.6 33.014,57.95 36.574,57.95 36.774,57.75 U1.52
  Bottom Side w0.3: v1(19.9,48.1) 20.8,48.1 28.8,40.1 28.8,35.6 30.2,34.2 v1(30.2,29.6) ; v1(21,54.7) 26.3,54.7 v1(26.4,54.6)
RADIO_SEL: U1.42 U7.4 | length 70.4
  Top Side w0.3: U7.4 21.557,6.457 23.3,8.2 23.3,12.1 29.7,18.5 29.7,27.4 28.8,28.3 28.8,33.024 30.676,34.9 33.924,34.9 35.124,33.7 40.7,33.7 41.4,34.4 41.4,40.9 32.75,49.55 U1.42
SLEEP: Sleep.1 U1.44 | length 61.9
  Top Side w0.3: U1.44 33.75,49.85 42.3,41.3 42.3,31.036 45.086,28.25 48.386,28.25 50.8,25.836 50.8,12 52,10.8 57.5,10.8 58.4,9.9 Sleep.1
SPCK: U1.21 U7.5 | length 95.5
  Top Side w0.3: v1(4.3,61.3) 4.354,61.354 5.758,61.354 6.604,62.2 20.2,62.2 20.65,61.75 U1.21 ; v1(5.1,54.2) 5.1,36.8 3.5,35.2 3.5,18.5 4.6,17.4 18,17.4 22.5,12.9 22.5,8.9 21.329,7.729 U7.5
  Bottom Side w0.3: v1(4.3,61.3) 5.1,60.5 v1(5.1,54.2)
STATUS0: R10.2 U1.48 | length 1.8
  Top Side w0.3: U1.48 36.895,53.33 R10.2
STATUS1: R12.2 U1.47 | length 2.5
  Top Side w0.3: U1.47 35.25,53.15 R12.2
SWCLK: H7.2 U1.53 | length 37.9
  Top Side w0.3: U1.53 39.367,58.25 40.917,56.7 60.3,56.7 62.8,59.2 62.8,66.5 H7.2
SWDIO: H7.4 U1.51 | length 37.7
  Top Side w0.3: U1.51 38.55,57.25 39.7,56.1 v1(39.7,53.708) ; v1(55.4,59.9) 55.525,60.025 61.225,60.025 62.1,60.9 62.1,66 61.58,66.52 H7.4
  Bottom Side w0.3: v1(39.7,53.708) 42.608,53.708 43.3,54.4 50.022,54.4 55.4,59.778 v1(55.4,59.9)
SWITCH1: S2.1 U1.43 | length 57.2
  Top Side w0.3: U1.43 33.25,49.714 41.85,41.114 41.85,30.85 44.9,27.8 48.2,27.8 50.3,25.7 50.3,11.864 51.814,10.35 52.65,10.35 53.1,9.9 S2.1
SWITCH_BUMP: H5.1 U1.10 | length 24.1
  Top Side w0.3: U1.10 31.25,66.56 31,66.81 31,71.8 v1(31.7,72.5)
  Bottom Side w0.3: H5.1 25.1,67.5 30.065,72.465 31.665,72.465 v1(31.7,72.5)
USB_DETECT: R1.1 R2.2 U1.35 | length 38.9
  Top Side w0.3: U1.35 29.25,56.45 v1(29.4,56.6) ; v1(37.1,69.8) 37.1,69.9 43.9,76.7 R2.2 44.6,78.6 R1.1
  Bottom Side w0.3: v1(29.4,56.6) 27,59 27,63.4 29.1,65.5 35.9,65.5 37.1,66.7 v1(37.1,69.8)
V_BATT: C25.1 C26.2 F1.1 H6.2 R6.2 U6.12 | length 67.9
  Top Side w0.5: F1.1 v1(10.3,44.2) ; U6.12 43.6,23.5 42.7,24.4 42.4,24.4 42.1,24.7 C25.1 44,25.1 v1(44.7,25.8) 45.8,25.8 46.1,25.5 C26.2
  Top Side w0.7: H6.2@16.66,77.2 19.75,77.2 R6.2
  Top Side w1: v1(11.2,77.2) H6.2@16.66,77.2